# Altium PCB DCCT_BOARD_V1.0.PcbDoc
Units mm, origin at the board's own origin, x right, y up, seen from the top; angles counter-clockwise.
Board outline 96 x 66 mm, 2 copper layers (Top Layer, Bottom Layer), stack 1.571 mm thick; 12 components, 12 nets, 70 pads, 0 vias.
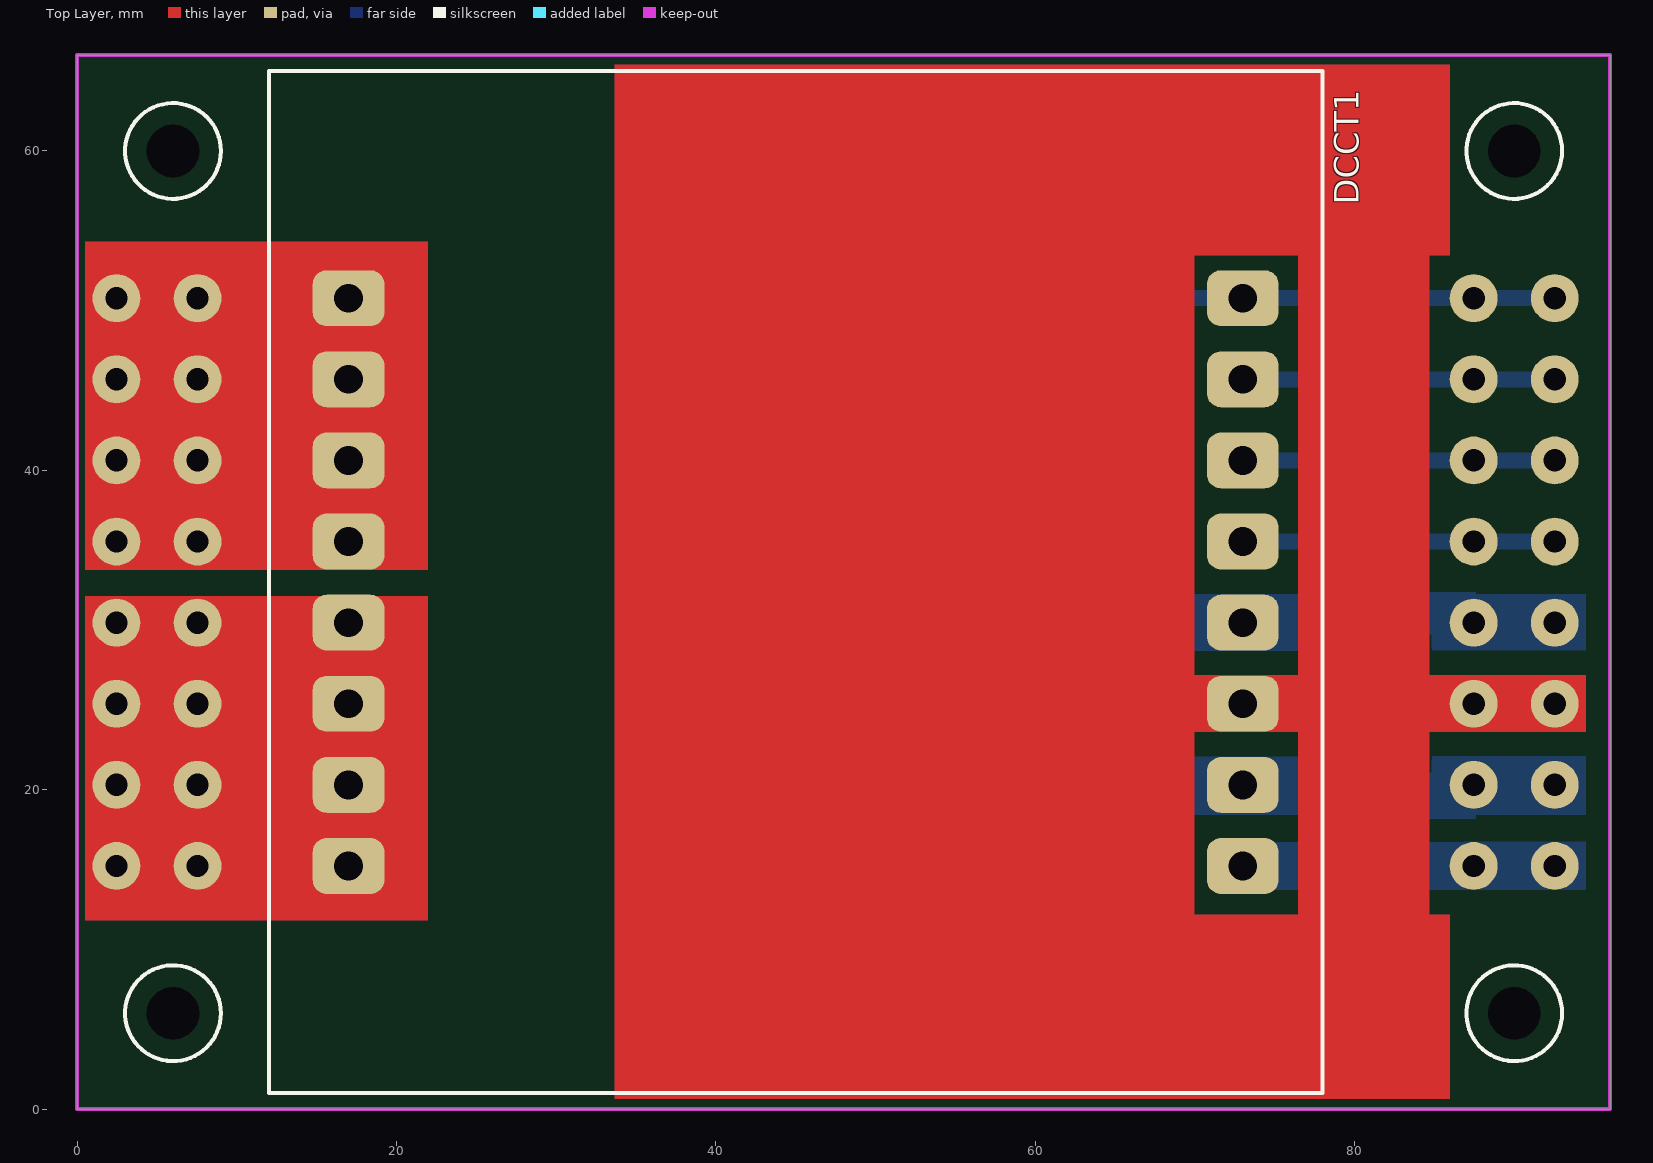
[diagram p0: Top Layer view]
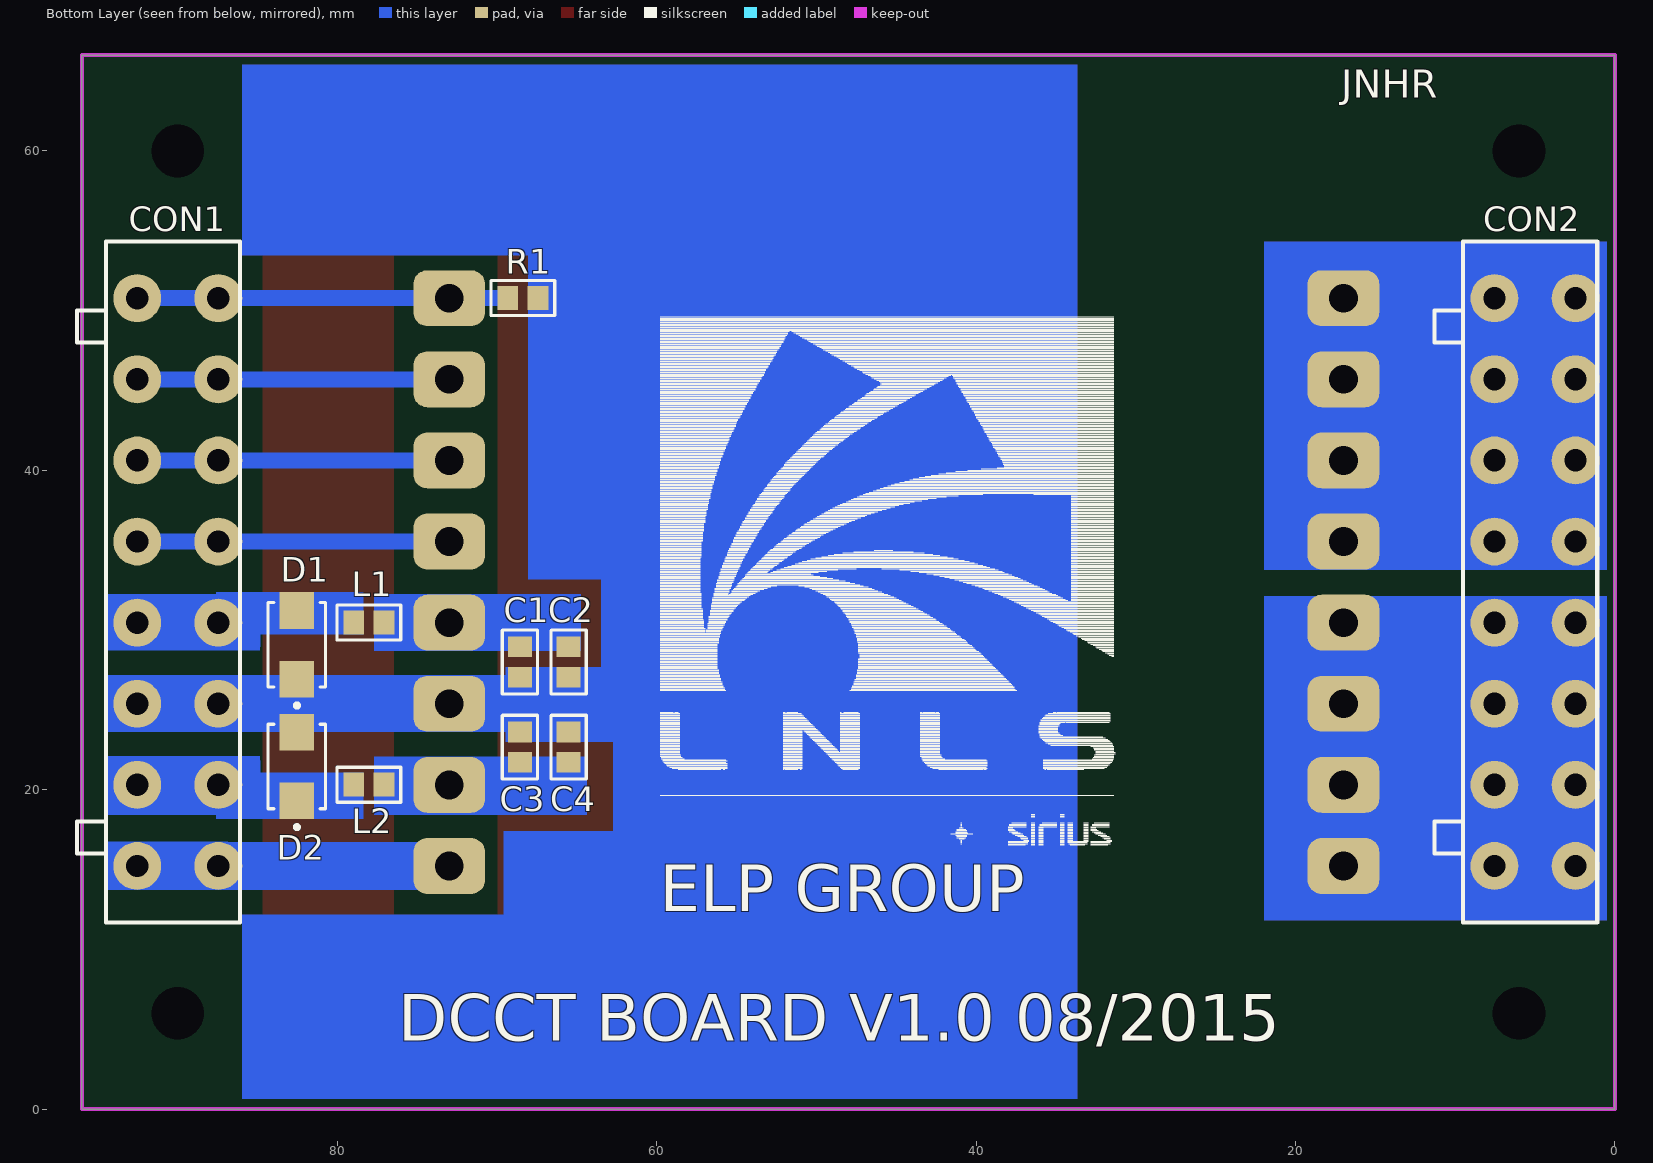
[diagram p1: Bottom Layer view, seen from below]
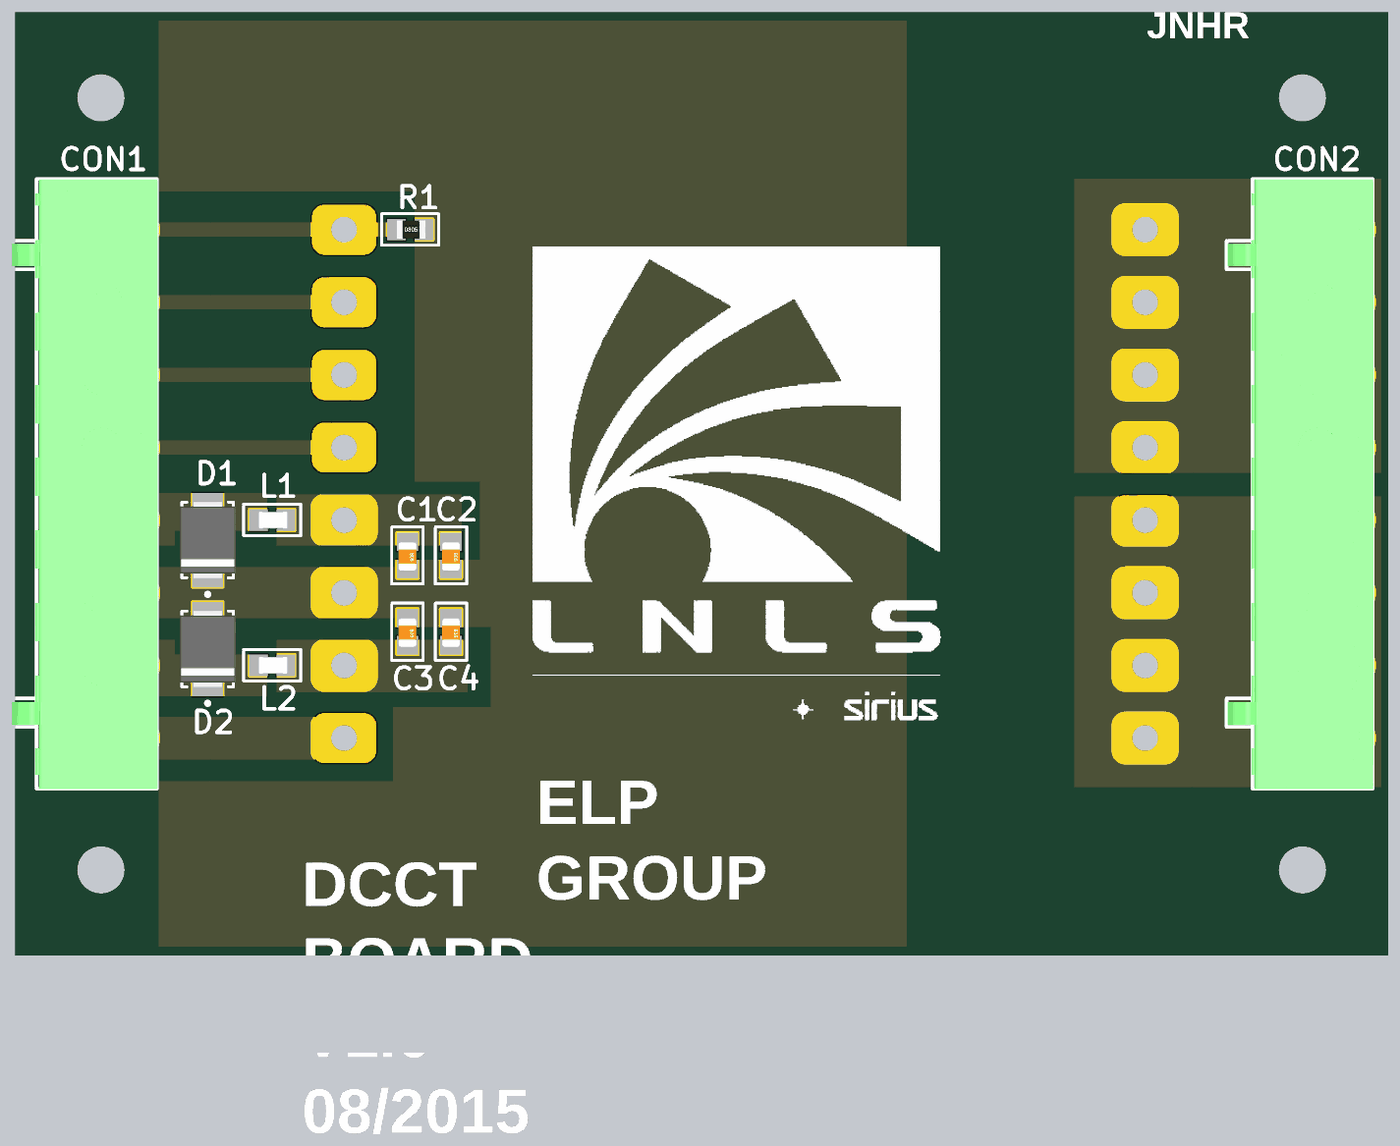
[diagram p2: 3D render of the assembled board from below, using the file's embedded part models]

## Layer stack, top to bottom
Top Layer: signal copper 0.0356
Dielectric: core 1.5, FR-4, Dk 4.8
Bottom Layer: signal copper 0.0356

## Board outline
0,0 96,0 96,66 0,66

## Design rules (kind name [scope] priority, off if disabled: settings)
Clearance [All] p1: gap=0.254
Height [All] p1: minheight=0 maxheight=50 prefheight=12.7
PolygonConnect [All] p1: connectstyle=Relief reliefconductorwidth=0.254 reliefentries=4 polygonreliefangle="90 Angle" airgapwidth=0.254
RoutingVias [All] p1: holewidth=0.711 width=1.27 viastyle="Through Hole" minholewidth=0.711 minwidth=1.27 maxholewidth=0.711 maxwidth=1.27
SolderMaskExpansion [All] p1: expansion=0.102
Width [All] p1: maxlimit=5 minlimit=0.254 preferedwidth=0.254
27 further rules are at their usual default settings.

## Components (designator, comment, footprint, x,y, rotation, side; value= is the part's Value field where it differs from the comment)
C1 "100nF" "0805 cap" 68.571,28.946 r270 bottom
C2 "10uF" "0805 cap" 65.523,28.946 r270 bottom
C3 "100nF" "0805 cap" 68.571,23.612 r270 bottom
C4 "10uF" "0805 cap" 65.523,23.612 r270 bottom
CON1 "1786006" 1786006 90,33 r180 bottom locked
CON2 "1786006" 1786006 5,33 r180 bottom locked
D1 "SMBJ15A" DIOM5336X265N 82.541,29.073 r90 bottom
D2 "SMBJ15A" DIOM5336X265N 82.541,21.453 r90 bottom
DCCT1 "ITN 12-P" "ITN 12-P" 45,33 r0 top locked
L1 "220R/100Mhz" "0805 ferrit" 78.985,30.47 r180 bottom
L2 "220R/100Mhz" "0805 ferrit" 78.985,20.31 r180 bottom
R1 "0R0" "0805 res" 69.333,50.79 r180 bottom

## Footprints (in the part's own frame and the unit in brackets; to place one, negate y for a bottom-side part, rotate by r counter-clockwise, add the part's x,y. Pads: shape width x height; smd on the part's side, far side on the other; paste and mask are expansions set on the pad)
"0805 cap" [mm]
  rect 1.3x1.5 smd: 1(1.9,0) 2(0,0)
  silkscreen extent -1.05,-1.1 2.95,1.1, body extent 0.02,-0.62 2.02,0.63, height 0.78
"0805 ferrit" [mm]
  rect 1.3x1.5 smd: 1(1.9,0) 2(0,0)
  silkscreen extent -1.05,-1.1 2.95,1.1, body extent 0.02,-0.6 2.02,0.6, height 0.95
"0805 res" [mm]
  rect 1.3x1.5 smd: 1(1.9,0) 2(0,0)
  silkscreen extent -1.05,-1.1 2.95,1.1, body extent 0.02,-0.62 2.02,0.63, height 0.59
1786006 [mm]
  round 3 hole 1.4: 1(-2.54,17.78) 1(2.54,17.78) 2(-2.54,12.7) 2(2.54,12.7) 3(-2.54,7.62) 3(2.54,7.62) 4(-2.54,2.54) 4(2.54,2.54) 5(-2.54,-2.54) 5(2.54,-2.54) 6(-2.54,-7.62) 6(2.54,-7.62) 7(-2.54,-12.7) 7(2.54,-12.7) 8(-2.54,-17.78) 8(2.54,-17.78)
  silkscreen extent -6.3,-21.32 3.9,21.32, body extent -6.24,-21.34 3.96,21.3, height 19.05
DIOM5336X265N [mm] "DO-214-AA/SMB Diode, Molded Body; 5.34mm L X 3.625mm W X 2.65mm H, IPC Medium Density"
  rect 2.3x2.15 smd: 1(-2.15,0) 2(2.15,0)
  silkscreen extent -3.92,-1.8 2.65,1.8, body extent -2.7,-1.95 2.7,1.95, height 2.4
"ITN 12-P" [mm]
  rrect50% 4.5x3.5 hole 1.8: 1(-28,17.78) 2(-28,12.7) 3(-28,7.62) 4(-28,2.54) 5(-28,-2.54) 6(-28,-7.62) 7(-28,-12.7) 8(-28,-17.78) 9(28,-17.78) 10(28,-12.7) 11(28,-7.62) 12(28,-2.54) 13(28,2.54) 14(28,7.62) 15(28,12.7) 16(28,17.78)
  silkscreen extent -33,-32 33,32, body extent -33.02,-32 33.02,32, height 45.7

## Part data
C1 C2 C3 C4: library part "Cap Ceram 0805", "Capacitor"
CON1 CON2: "TERM BLOCK HDR 8POS VERT 5.08MM"
D1 D2: "Zener Diode"
DCCT1: "High Performance Current Transducer for PCB assembly"
L1 L2: library part "Ferrite Bead 0805", "FERRITE BEAD,SMD 0805,220 OHMS"
R1: library part "Resistor 0805", "Resistor 1/4W"

## Free pads (board coordinates)
  round 0 hole 3.3 unplated paste-5 mask-5: MEC(6,6) MEC(6,60) MEC(90,6) MEC(90,60)

## Nets (pads, with @x,y where several pads share a name; then routed paths per layer and width w, separated by ;. In a path a pad name is that pad's centre, name@x,y a point inside that pad or via, vN(x,y) a via of type N, cw(c..) or ccw(c..) an arc to the next point about the centre after c; other vN are vias at no path point)
NetC1_1: C1.1 C2.1 C3.2 C4.2 CON1.6 D1.1 D2.2 DCCT1.11 R1.1
NetC1_2: C1.2 C2.2 DCCT1.12 L1.1
NetC3_1: C3.1 C4.1 DCCT1.10 L2.1
NetCON1_1: CON1.1 DCCT1.16 R1.2 | length 23.2
  Bottom Layer w1: R1.2@69.343,50.78 DCCT1.16 87.46,50.78 CON1.1@92.54,50.78
NetCON1_2: CON1.2 DCCT1.15 | length 19.5
  Bottom Layer w1: DCCT1.15 87.46,45.7 CON1.2@92.54,45.7
NetCON1_3: CON1.3 DCCT1.14 | length 19.5
  Bottom Layer w1: DCCT1.14 87.46,40.62 CON1.3@92.54,40.62
NetCON1_4: CON1.4 DCCT1.13 | length 19.5
  Bottom Layer w1: DCCT1.13@73,35.55 CON1.4@87.45,35.55 ; CON1.4@87.46,35.54 CON1.4@92.54,35.54
NetCON1_5: CON1.5 D1.2 L1.2 | length 9.1
  Bottom Layer w1: L1.2 79.738,31.223 D1.2 86.697,31.223 CON1.5@87.46,30.46
NetCON1_7: CON1.7 D2.1 L2.2 | length 9.3
  Bottom Layer w1: L2.2 79.992,19.303 D2.1 86.463,19.303 CON1.7@87.46,20.3
NetCON1_8: CON1.8 DCCT1.9 | length 14.5
  Bottom Layer w3: DCCT1.9 CON1.8@87.46,15.22
NetCON2_1: CON2.1 CON2.2 CON2.3 CON2.4 DCCT1.1 DCCT1.2 DCCT1.3 DCCT1.4
NetCON2_5: CON2.5 CON2.6 CON2.7 CON2.8 DCCT1.5 DCCT1.6 DCCT1.7 DCCT1.8

## Keep-outs
Keep-Out Layer:
  the board outline again, w0.254

## Other copper
Top Layer:
  rectangle net NetC1_1: 83.82,23.622 94.488,27.178
  rectangle net NetC1_1: 68.453,53.467 85.979,65.405
  rectangle net NetC1_1: 69.342,23.622 78.613,27.178
  rectangle net NetC1_1: 76.454,11.684 84.709,65.405
  rectangle net NetC1_1: 69.723,0.635 85.979,12.192
  rectangle net NetC1_1: 59.817,19.05 69.977,37.211
  rectangle net NetC1_1: 60.579,0.635 69.977,20.193
  rectangle net NetC1_1: 60.579,36.957 69.977,42.545
  rectangle net NetC1_1: 60.833,41.656 69.977,65.405
  rectangle net NetC1_1: 33.655,0.635 61.214,65.405
  rectangle net NetCON2_1: 0.499,33.772 21.962,54.346
  rectangle net NetCON2_5: 0.499,11.801 21.962,32.121
Bottom Layer:
  rectangle net NetCON1_8: 86.868,13.716 94.488,16.764
  rectangle net NetCON1_7: 84.836,18.415 94.488,22.098
  rectangle net NetCON1_5: 84.836,28.702 94.488,32.258
  rectangle net NetC1_1: 33.655,0.635 58.801,65.405
  rectangle net NetC1_1: 58.42,53.467 85.979,65.405
  rectangle net NetC1_1: 69.215,0.635 85.979,12.192
  rectangle net NetC1_1: 58.42,0.635 69.596,17.399
  rectangle net NetC1_1: 58.42,16.891 62.738,23.622
  rectangle net NetC1_1: 62.611,33.147 68.072,53.721
  rectangle net NetC1_1: 58.42,25.273 63.5,53.721
  rectangle net NetC1_1: 58.42,22.987 69.469,27.686
  rectangle net NetC1_2: 64.761,28.692 77.715,32.248
  rectangle net NetC1_1: 64.38,23.612 94.488,27.168
  rectangle net NetC3_1: 64.38,18.405 77.715,22.088
  rectangle net NetCON1_5: 79.366,29.718 87.621,32.375
  rectangle net NetCON1_5: 78.359,29.708 80.255,32.375
  rectangle net NetCON1_5: 84.827,28.946 87.748,30.978
  rectangle net NetCON1_7: 78.359,18.151 80.255,21.072
  rectangle net NetCON1_7: 79.62,18.151 87.621,21.082
  rectangle net NetCON1_7: 84.827,19.294 87.494,21.834
  rectangle net NetCON2_1: 0.499,33.772 21.962,54.346
  rectangle net NetCON2_5: 0.499,11.801 21.962,32.121

## Silkscreen, mask and mechanical layers (free items; w line width, h text height)
Top Overlay:
  circle w0.254: c6,60 r3
  circle w0.254: c90,60 r3
  circle w0.254: c90,6 r3
  circle w0.254: c6,6 r3
Bottom Overlay:
  drawing of 1428 lines, arcs and shapes, not listed
  text "JNHR" at 17.145,62.738 h3
  text "ELP GROUP" at 59.817,11.43 h5
  text "DCCT BOARD V1.0 08/2015" at 76.2,3.302 h5